# Altium PCB adacus_pcb.PcbDoc
Units mil, origin at the board's own origin, x right, y up, seen from the top; angles counter-clockwise.
Board outline 2700 x 3700 mil, 4 copper layers (Top Layer (SIG), Layer 2 (GND), Layer 3 (GND), Bottom Layer (SIG)), stack 62.449 mil thick; 113 components, 68 nets, 339 pads, 48 vias.
Unrouted connection lines stored in the file: 238.
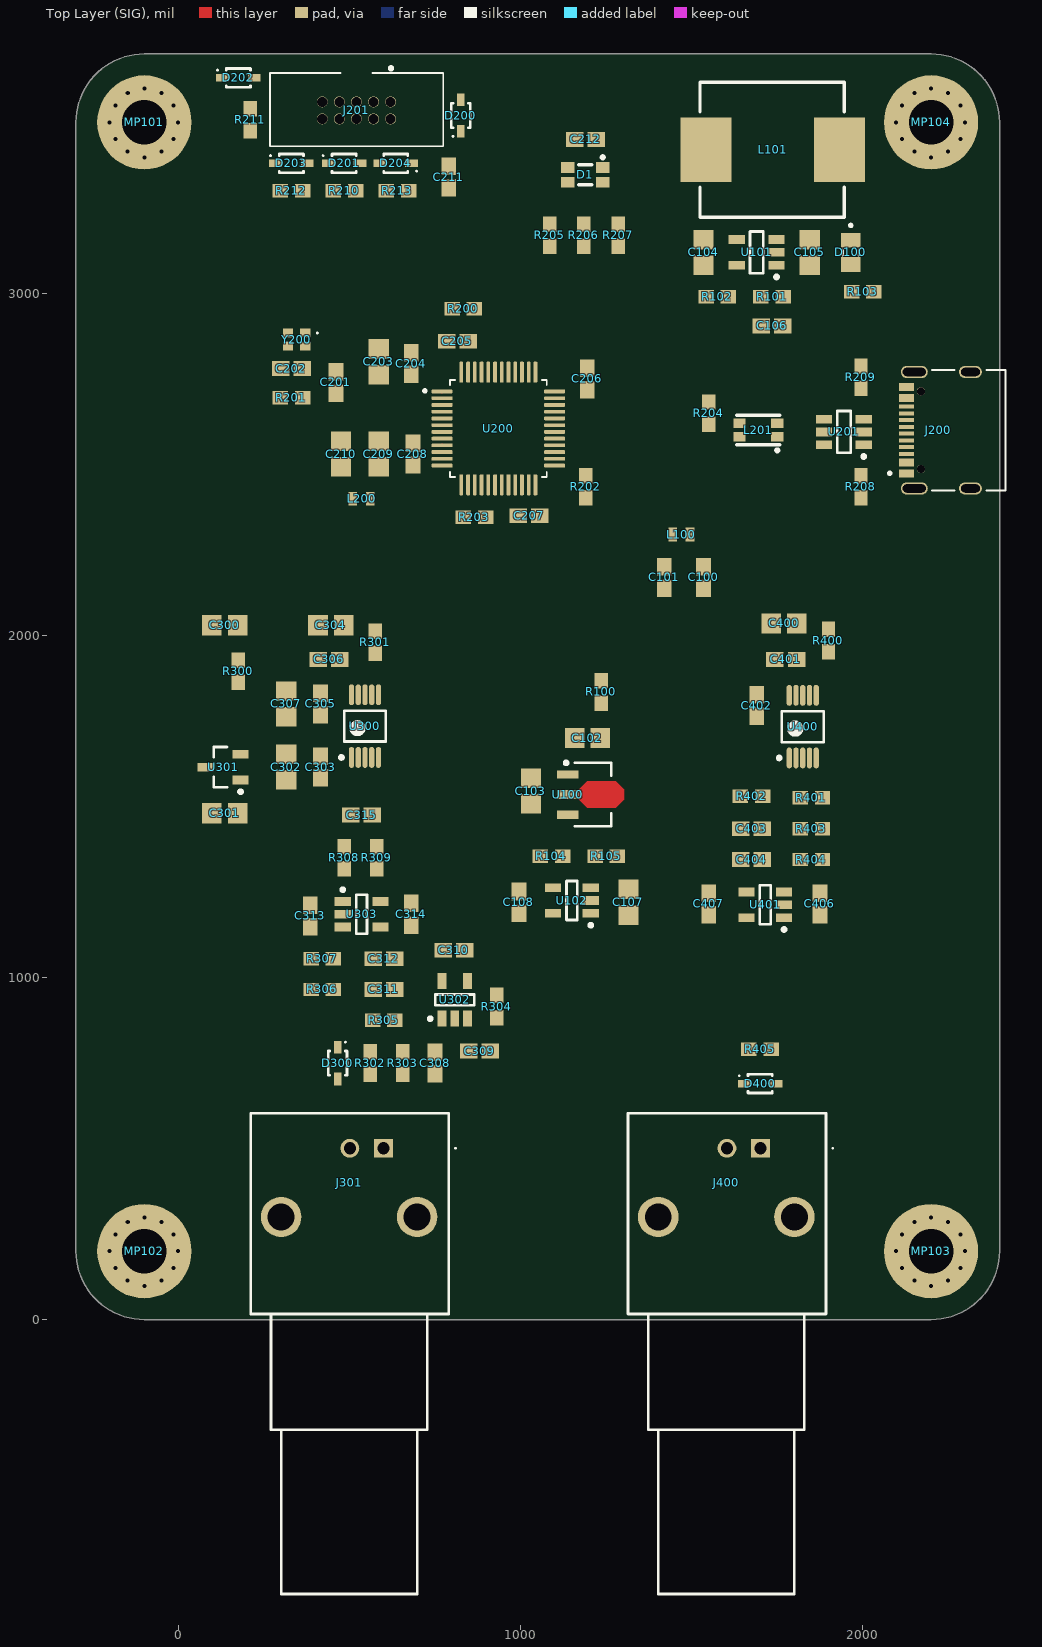
[diagram p0: Top Layer (SIG) view]
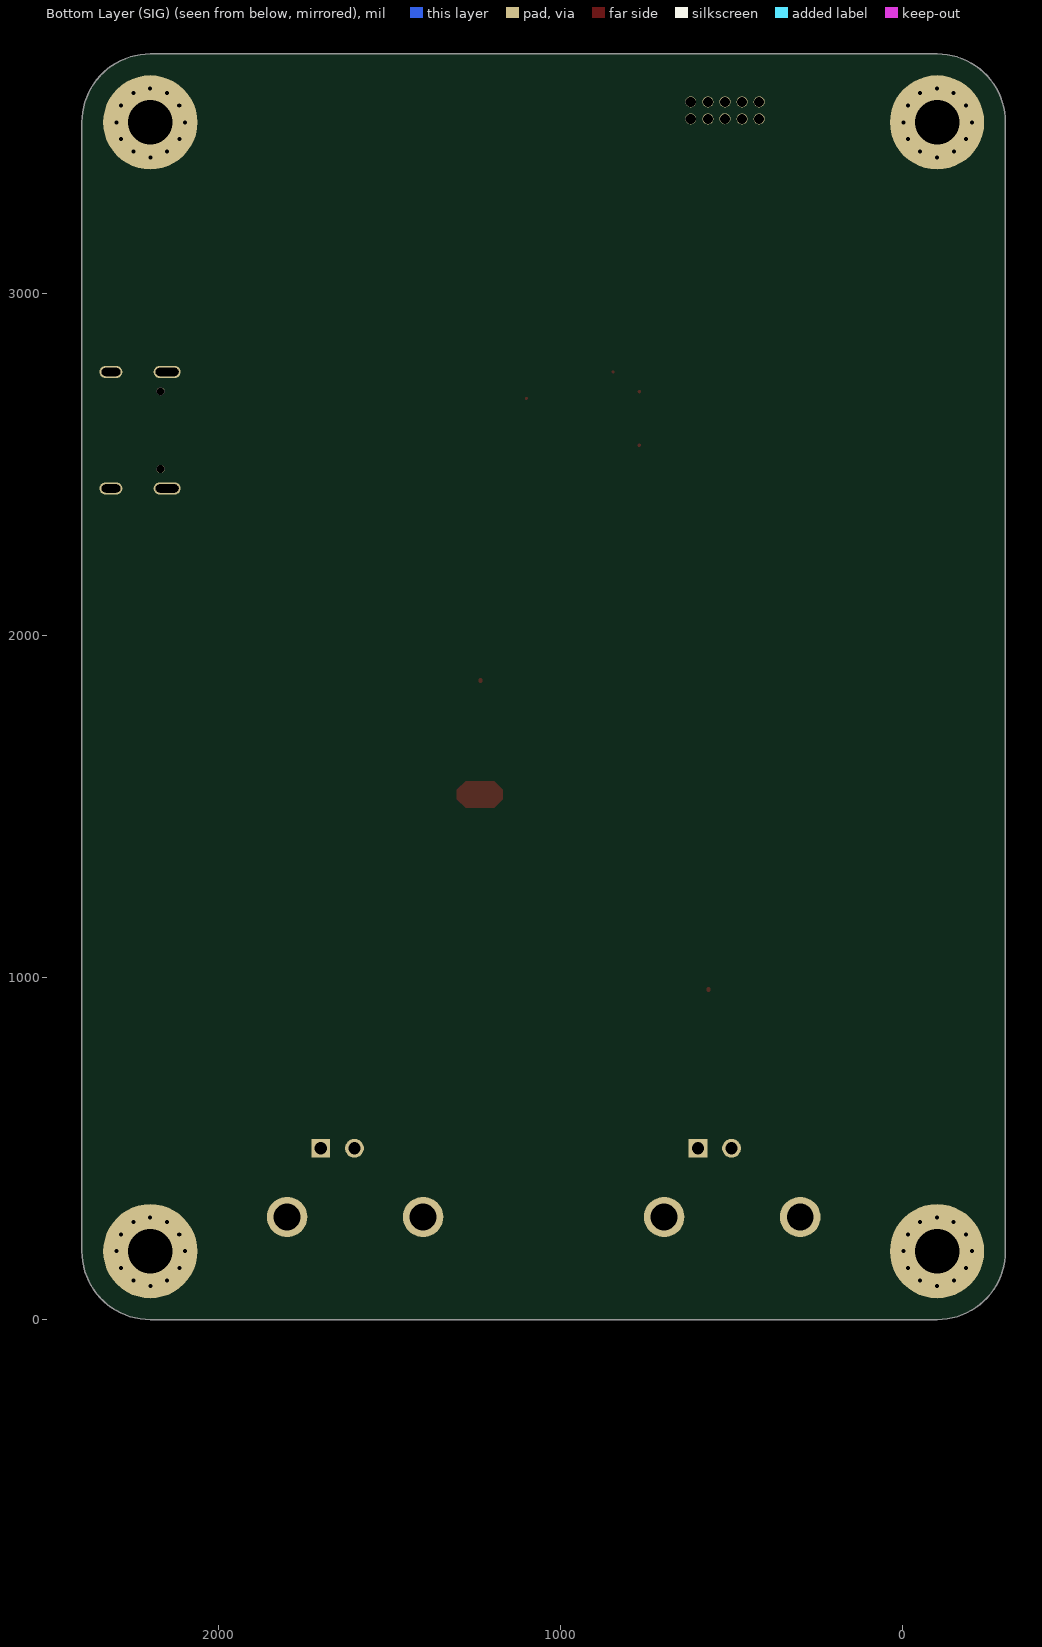
[diagram p1: Bottom Layer (SIG) view, seen from below]

## Layer stack, top to bottom
Top Solder: solder mask 1, SM-001, Dk 3.8
Top Layer (SIG): signal copper 1.378
Dielectric 2: prepreg 8.2835, PP-022, Dk 4.4
Layer 2 (GND): signal copper 0.5984
Dielectric 1: core 41.9291, FR-4, Dk 4.6
Layer 3 (GND): signal copper 0.5984
Dielectric 3: prepreg 8.284, PP-022, Dk 4.4
Bottom Layer (SIG): signal copper 1.378
Bottom Solder: solder mask 1, SM-001, Dk 3.8

## Board outline
-300,200 -300,3500 cw(c-100,3500) -100,3700 2200,3700 cw(c2200,3500) 2400,3500 2400,200 cw(c2200,200) 2200,0 -100,0 cw(c-100,200)

## Design rules (kind name [scope] priority, off if disabled: settings)
BoardOutlineClearance [All] p1: gap=10 ignorepadtopadclearanceinfootprint=FALSE except(0: Arc-SplitContinuation Track-SplitContinuation SMDPad-SplitContinuation THPad-SplitContinuation Via-SplitContinuation Fill-SplitContinuation Poly-SplitContinuation Region-SplitContinuation Text-SplitContinuation)
Clearance Clearance_basic_JLCPCB [All] p1: gap=9.84 ignorepadtopadclearanceinfootprint=TRUE except(5.91: SMDPad-SMDPad; 7.87: Arc-SMDPad Track-SMDPad; 11.81: Arc-Via Track-Via Via-Via; 14.96: Arc-THPad Track-THPad; 21.65: THPad-THPad)
DiffPairsRouting DiffPairsRouting_basic [All] p1: maxlimit=10 minlimit=8 mostfreqgap=8 toplayer_minwidth=5 toplayer_maxwidth=15 toplayer_prefwidth=10.28 midlayer1_minwidth=5 midlayer1_maxwidth=15 midlayer1_prefwidth=10.28 midlayer2_minwidth=5 midlayer2_maxwidth=15 midlayer2_prefwidth=10.28 bottomlayer_minwidth=5 bottomlayer_maxwidth=15 bottomlayer_prefwidth=10.28 maxuncoupledlength=500
DiffPairsRouting [All] p2: maxlimit=10 minlimit=10 mostfreqgap=10 toplayer_minwidth=15 toplayer_maxwidth=15 toplayer_prefwidth=15 midlayer1_minwidth=15 midlayer1_maxwidth=15 midlayer1_prefwidth=15 midlayer2_minwidth=15 midlayer2_maxwidth=15 midlayer2_prefwidth=15 bottomlayer_minwidth=15 bottomlayer_maxwidth=15 bottomlayer_prefwidth=15 maxuncoupledlength=500
HoleSize [All] p1: absolutevalues=TRUE maxlimit=248.03 minlimit=7.87 maxpercent=80.000 minpercent=20.000
HoleToHoleClearance [All] p1: gap=21.65 allowstackedmicrovias=FALSE
MinimumAnnularRing [All] p1: minimumring=5.12
PolygonConnect [All] p1: connectstyle=Relief reliefconductorwidth=10 reliefentries=4 polygonreliefangle="90 Angle" airgapwidth=10
RoutingVias [All] p1: holewidth=28 width=50 viastyle="Through Hole" minholewidth=5.91 minwidth=9.84 maxholewidth=28 maxwidth=50
SolderMaskExpansion [All] p1: expansion=4 istentingtop=FALSE
SupplyNets "Schematic Supply Nets_6" [InNet('+5V')] p1: voltage=0.000
SupplyNets "Schematic Supply Nets_5" [InNet('+3V3')] p2: voltage=0.000
SupplyNets "Schematic Supply Nets_4" [InNet('GND')] p3: voltage=0.000
SupplyNets "Schematic Supply Nets_3" [InNet('VDDA')] p4: voltage=0.000
SupplyNets "Schematic Supply Nets_2" [InNet('+VBUS')] p5: voltage=0.000
SupplyNets "Schematic Supply Nets_1" [InNet('+3V3A')] p6: voltage=0.000
SupplyNets "Schematic Supply Nets" [InNet('VCOM')] p7: voltage=0.000
Width [All] p1: maxlimit=100 minlimit=3.5 preferedwidth=10
27 further rules are at their usual default settings.

## Classes and differential pairs
component class Power_adacus_sch: C100 C101 C102 C103 C104 C105 C106 C107 C108 D100 L100 L101 MP101 MP102 MP103 MP104 R100 R101 R102 R103 R104 R105 U100 U101 U102
component class MCU_adacus_sch: C201 C202 C203 C204 C205 C206 C207 C208 C209 C210 C211 C212 D1 D200 D201 D202 D203 D204 J200 J201 L200 L201 R200 R201 R202 R203 R204 R205 R206 R207 R208 R209 R210 R211 R212 R213 U200 U201 Y200
component class DAC_adacus_sch: C400 C401 C402 C403 C404 C406 C407 D400 J400 R400 R401 R402 R403 R404 R405 U400 U401
component class Analog_adacus_sch: C300 C301 C302 C303 C304 C305 C306 C307 C308 C309 C310 C311 C312 C313 C314 C315 D300 J301 R300 R301 R302 R303 R304 R305 R306 R307 R308 R309 U300 U301 U302 U303
differential pair MCU_USB: +MCU_USB_P -MCU_USB_N
differential pair MCU_ESD_USB: +MCU_ESD_USB_P -MCU_ESD_USB_N
differential pair USB_CONN_D: +USB_CONN_D_P -USB_CONN_D_N

## Components (designator, comment, footprint, x,y, rotation, side; value= is the part's Value field where it differs from the comment)
C100 "Capacitor" "[0603] CAPC1608X10M [A-LD]" 1535,2170 r90 top value=1u/10V
C101 "Capacitor" "[0603] CAPC1608X10M [A-LD]" 1420,2170 r90 top value=1u/10V
C102 "Capacitor" "[0805] CAPC2012X09M [A - LD]" 1195,1700 r0 top value=22u/10V
C103 "Capacitor" "[0805] CAPC2012X09M [A - LD]" 1030,1545 r270 top value=22u/10V
C104 "Capacitor" "[0805] CAPC2012X09M [A - LD]" 1535,3120 r90 top value=22u/10V
C105 "Capacitor" "[0805] CAPC2012X09M [A - LD]" 1845,3120 r90 top value=22u/10V
C106 "Capacitor" "[0603] CAPC1608X10M [A-LD]" 1735,2905 r0 top value=DPN
C107 "Capacitor" "[0805] CAPC2012X09M [A - LD]" 1315,1220 r90 top value=22u/10V
C108 "Capacitor" "[0603] CAPC1608X10M [A-LD]" 995,1220 r90 top value=100n/10V
C201 "Capacitor" "[0603] CAPC1608X10M [A-LD]" 460,2740 r90 top value=10p/10V
C202 "Capacitor" "[0603] CAPC1608X10M [A-LD]" 330,2780 r180 top value=10p/10V
C203 "Capacitor" "[0805] CAPC2012X09M [A - LD]" 585,2800 r270 top value=10u/10V
C204 "Capacitor" "[0603] CAPC1608X10M [A-LD]" 680,2795 r270 top value=100n/10V
C205 "Capacitor" "[0603] CAPC1608X10M [A-LD]" 815,2860 r0 top value=100n/10V
C206 "Capacitor" "[0603] CAPC1608X10M [A-LD]" 1195,2750 r270 top value=100n/10V
C207 "Capacitor" "[0603] CAPC1608X10M [A-LD]" 1025,2350 r0 top value=100n/10V
C208 "Capacitor" "[0603] CAPC1608X10M [A-LD]" 685,2530 r270 top value=10n/10V
C209 "Capacitor" "[0805] CAPC2012X09M [A - LD]" 585,2530 r270 top value=1u/10V
C210 "Capacitor" "[0805] CAPC2012X09M [A - LD]" 475,2530 r270 top value=1u/10V
C211 "Capacitor" "[0603] CAPC1608X10M [A-LD]" 790,3340 r270 top value=100n/10V
C212 "Capacitor" "[0603] CAPC1608X10M [A-LD]" 1190,3450 r0 top value=100n/10V
C300 "Capacitor" "[0805] CAPC2012X09M [A - LD]" 135,2030 r0 top value=10u/10V
C301 "Capacitor" "[0805] CAPC2012X09M [A - LD]" 135,1480 r0 top value=10u/10V
C302 "Capacitor" "[0805] CAPC2012X09M [A - LD]" 315,1615 r90 top value=10u/10V
C303 "Capacitor" "[0603] CAPC1608X10M [A-LD]" 415,1615 r90 top value=100n/10V
C304 "Capacitor" "[0805] CAPC2012X09M [A - LD]" 445,2030 r0 top value=10u/10V
C305 "Capacitor" "[0603] CAPC1608X10M [A-LD]" 415,1800 r90 top value=100n/10V
C306 "Capacitor" "[0603] CAPC1608X10M [A-LD]" 440,1930 r0 top value=100n/10V
C307 "Capacitor" "[0805] CAPC2012X09M [A - LD]" 315,1800 r90 top value=10u/10V
C308 "Capacitor" "[0603] CAPC1608X10M [A-LD]" 750,750 r90 top value=150p/10V
C309 "Capacitor" "[0603] CAPC1608X10M [A-LD]" 880,785 r180 top value=100n/10V
C310 "Capacitor" "[0603] CAPC1608X10M [A-LD]" 805,1080 r0 top value=100n/10V
C311 "Capacitor" "[0603] CAPC1608X10M [A-LD]" 600,965 r180 top value=150p/10V
C312 "Capacitor" "[0603] CAPC1608X10M [A-LD]" 600,1055 r180 top value=150p/10V
C313 "Capacitor" "[0603] CAPC1608X10M [A-LD]" 385,1180 r270 top value=1n/10V
C314 "Capacitor" "[0603] CAPC1608X10M [A-LD]" 680,1185 r270 top value=100n/10V
C315 "Capacitor" "[0603] CAPC1608X10M [A-LD]" 535,1475 r180 top value=150p/10V
C400 "Capacitor" "[0805] CAPC2012X09M [A - LD]" 1770,2035 r0 top value=10u/10V
C401 "Capacitor" "[0603] CAPC1608X10M [A-LD]" 1775,1930 r0 top value=100n/10V
C402 "Capacitor" "[0603] CAPC1608X10M [A-LD]" 1690,1795 r90 top value=1u/10V
C403 "Capacitor" "[0603] CAPC1608X10M [A-LD]" 1675,1435 r0 top value=150p/10V
C404 "Capacitor" "[0603] CAPC1608X10M [A-LD]" 1675,1345 r0 top value=150p/10V
C406 "Capacitor" "[0603] CAPC1608X10M [A-LD]" 1875,1215 r90 top value=1n/10V
C407 "Capacitor" "[0603] CAPC1608X10M [A-LD]" 1550,1215 r90 top value=100n/10V
D1 "E6C1206RGBC3UDA" E6C1206RGBC3UDA 1137.64,3368.31 r0 top
D100 "LED GREEN" LEDC2012X120N 1965,3120 r270 top
D200 "PESD3V3L1BA,115" SODFL250X110-2M 825,3520 r90 top
D201 "PESD3V3L1BA,115" SODFL250X110-2M 483.74,3380 r0 top
D202 "PESD3V3L1BA,115" SODFL250X110-2M 175,3630 r0 top
D203 "PESD3V3L1BA,115" SODFL250X110-2M 330,3380 r0 top
D204 "PESD3V3L1BA,115" SODFL250X110-2M 635,3380 r180 top
D300 "PESD3V3L1BA,115" SODFL250X110-2M 465,750 r270 top
D400 "PESD3V3L1BA,115" SODFL250X110-2M 1700,690 r0 top
J200 "USB TYPE-C" HRO_TYPE-C-31-M-12 2315,2600 r90 top
J201 "2x5x1.27mm" 2X10_BOXHEADER 520,3535 r180 top
J301 "DOSIN-801-0031" DOSIN8010031 599.21,500.79 r180 top
J400 "DOSIN-801-0031" DOSIN8010031 1701.57,500.79 r180 top
L100 "Inductor" PM0603-10NJ 1495,2295 r180 top value=10n/0.15R
L101 "Inductor" "[L] SPM10054T-680M-HZR" 1735,3420 r180 top value=68u
L200 "Inductor" PM0603-10NJ 509.61,2400 r0 top value=10n
L201 "CMF3216F-900-2P-T" CMF3216F-900-2P-T 1750.25,2620 r180 top
MP101 "Mounting hole" Mounting_hole_M3 -100,3500 r0 top
MP102 "Mounting hole" Mounting_hole_M3 -100,200 r0 top
MP103 "Mounting hole" Mounting_hole_M3 2200,200 r0 top
MP104 "Mounting hole" Mounting_hole_M3 2200,3500 r0 top
R100 "Resistor" "[0603] RESC1608X06M [A-LD]" 1235,1835 r270 top value=10R/5%
R101 "Resistor" "[0603] RESC1608X06M [A-LD]" 1735,2990 r0 top value=100K/5%
R102 "Resistor" "[0603] RESC1608X06M [A-LD]" 1575,2990 r0 top value=22K/5%
R103 "Resistor" "[0603] RESC1608X06M [A-LD]" 2000,3005 r180 top value=1K/5%
R104 "Resistor" "[0603] RESC1608X06M [A-LD]" 1090,1355 r180 top value=1K/5%
R105 "Resistor" "[0603] RESC1608X06M [A-LD]" 1250,1355 r180 top value=1K/5%
R200 "Resistor" "[0603] RESC1608X06M [A-LD]" 832.48,2955 r0 top value=10K/5%
R201 "Resistor" "[0603] RESC1608X06M [A-LD]" 330,2695 r0 top value=0R
R202 "Resistor" "[0603] RESC1608X06M [A-LD]" 1190,2435 r270 top value=10K/5%
R203 "Resistor" "[0603] RESC1608X06M [A-LD]" 865,2345 r0 top value=1k5/5%
R204 "Resistor" "[0603] RESC1608X06M [A-LD]" 1550,2650 r90 top value=1K5/5%
R205 "Resistor" "[0603] RESC1608X06M [A-LD]" 1085,3170 r270 top value=1K/5%
R206 "Resistor" "[0603] RESC1608X06M [A-LD]" 1185,3170 r270 top value=1K/5%
R207 "Resistor" "[0603] RESC1608X06M [A-LD]" 1285,3170 r270 top value=1K/5%
R208 "Resistor" "[0603] RESC1608X06M [A-LD]" 1995,2435 r270 top value=5K1/5%
R209 "Resistor" "[0603] RESC1608X06M [A-LD]" 1995,2755 r90 top value=5K1/5%
R210 "Resistor" "[0603] RESC1608X06M [A-LD]" 485,3300 r180 top value=49R9/5%
R211 "Resistor" "[0603] RESC1608X06M [A-LD]" 210,3507.52 r270 top value=49R9/5%
R212 "Resistor" "[0603] RESC1608X06M [A-LD]" 330,3300 r180 top value=49R9/5%
R213 "Resistor" "[0603] RESC1608X06M [A-LD]" 640,3300 r0 top value=49R9/5%
R300 "Resistor" "[0603] RESC1608X06M [A-LD]" 175,1895 r90 top value=49R9/5%
R301 "Resistor" "[0603] RESC1608X06M [A-LD]" 575,1980 r90 top value=0R
R302 "Resistor" "[0603] RESC1608X06M [A-LD]" 560,750 r90 top value=1k/5%
R303 "Resistor" "[0603] RESC1608X06M [A-LD]" 655,750 r90 top value=2M2/5%
R304 "Resistor" "[0603] RESC1608X06M [A-LD]" 930,915 r90 top value=2M2/5%
R305 "Resistor" "[0603] RESC1608X06M [A-LD]" 600,875 r0 top value=6K8/5%
R306 "Resistor" "[0603] RESC1608X06M [A-LD]" 420,965 r0 top value=6K8/5%
R307 "Resistor" "[0603] RESC1608X06M [A-LD]" 420,1055 r180 top value=6K8/5%
R308 "Resistor" "[0603] RESC1608X06M [A-LD]" 485,1350 r270 top value=1K/5%
R309 "Resistor" "[0603] RESC1608X06M [A-LD]" 580,1350 r270 top value=1K/5%
R400 "Resistor" "[0603] RESC1608X06M [A-LD]" 1900,1985 r90 top value=0R
R401 "Resistor" "[0603] RESC1608X06M [A-LD]" 1850,1525 r0 top value=10K/5%
R402 "Resistor" "[0603] RESC1608X06M [A-LD]" 1675,1530 r180 top value=6K8/5%
R403 "Resistor" "[0603] RESC1608X06M [A-LD]" 1850,1435 r180 top value=6K8/5%
R404 "Resistor" "[0603] RESC1608X06M [A-LD]" 1850,1345 r0 top value=6K8/5%
R405 "Resistor" "[0603] RESC1608X06M [A-LD]" 1700,790 r180 top value=6K8/5%
U100 "HT7533-1" SOT89-150P354X160-3M 1210,1535 r0 top
U101 "TLV62569" SOT95P280X145-5M 1690,3120 r180 top
U102 "MCP6001UT-I/OT" SOT95P270X145-5M 1150,1225 r180 top
U200 "STM32F103CBT6" TSQFP50P900X900X160-48M 935,2605 r0 top
U201 "USBLC6-2SC6" SOT95P280X145-6M 1945,2595 r180 top
U300 "ADC141S626" TSSOP50P490X110-10M 545,1735 r90 top
U301 "REF3033AIDBZT" SOT95P237X112-3M 130,1615 r180 top
U302 "MCP6001UT-E/OT" SOT95P270X145-5M 807.4,934.88 r90 top
U303 "MCP6001UT-E/OT" SOT95P270X145-5M 535,1185 r0 top
U400 "DAC7563SDGSR" TSSOP50P490X110-10M 1824.69,1733.46 r90 top
U401 "MCP6001UT-E/OT" SOT95P270X145-5M 1715.12,1212.4 r180 top
Y200 "ECS-2016MV-160-DN" ECS-2016MV-160-DN 345,2865 r180 top

## Footprints (in the part's own frame and the unit in brackets; to place one, negate y for a bottom-side part, rotate by r counter-clockwise, add the part's x,y. Pads: shape width x height; smd on the part's side, far side on the other; paste and mask are expansions set on the pad)
2X10_BOXHEADER [mil]
  round 32 hole 29.53: 1(-100,-25) 2(-100,25) 3(-50,-25) 4(-50,25) 5(0,-25) 6(0,24.61) 7(50,-25) 8(50,25) 9(100,-25) 10(100,25)
  silkscreen extent -254,-127 252,105, body extent -249,-104 249,100, height 213
"[0603] CAPC1608X10M [A-LD]" [mm] "Chip Capacitor, 2-Leads, Body 1.60x0.80mm, IPC Low Density"
  rect 1.3x1.1 smd: 1(-0.8,0) 2(0.8,0)
  body extent -0.9,-0.5 0.9,0.5, height 1
"[0603] RESC1608X06M [A-LD]" [mm] "Chip Resistor, 2-Leads, Body 1.60x0.80mm, IPC Low Density"
  rect 1.15x1 smd: 1(-0.825,0) 2(0.825,0)
  body extent -0.85,-0.45 0.85,0.45, height 0.55
"[0805] CAPC2012X09M [A - LD]" [mm] "Chip Capacitor, 2-Leads, Body 2.00x1.25mm, IPC Low Density"
  rect 1.45x1.5 smd: 1(-0.95,0) 2(0.95,0)
  body extent -1.07,-0.67 1.07,0.67, height 0.9
"[L] SPM10054T-680M-HZR" [mm] "Power Inductors - SMD 68uH 20% 3.7A 163Mohm"
  rect 3.8x4.8 smd: 1(-5,0) 2(4.9,0)
  silkscreen extent -5.35,-5 5.35,5, body extent -5.35,-5 5.35,5, height 5.26
CMF3216F-900-2P-T [mm] "90O@100MHz 0.3O 2 1206 Common Mode Filters ROHS"
  rect 0.9x0.7 smd paste+0 mask+0.051: 1(0,1) 2(0,0) 3(2.8,0) 4(2.8,1)
  silkscreen extent -0.2,-0.6 3,2.1
DOSIN8010031 [mm]
  rect 1.4x1.4 hole 0.9: 1(0,0)
  round 1.4 hole 0.9: 2(2.5,0)
  round 3 hole 2: MH1(-2.5,5.1) MH2(7.6,5.1)
  silkscreen extent -5.4,-2.6 9.85,33.1
E6C1206RGBC3UDA [mm] "RGB 1206 Light Emitting Diodes (LED) ROHS"
  rect 1x0.8 smd paste+0 mask+0.051: 1(0,0) 2(2.6,0) 3(0,-1.1) 4(2.6,-1.1)
  silkscreen extent 0.8,-1.3 2.7,0.85, body extent -0.18,-1.33 2.82,0.17, height 1.2
ECS-2016MV-160-DN [mm] "Standard Clock Oscillators 16.000 MHz Standby CMOS Multi-Volt 1.6 - 3.6 V +/-20ppm -40 - 85C 4-SMD 2.0 x 1.6mm"
  rect 0.775x0.675 smd: 1(-0.638,-0.488) 2(0.638,-0.488) 3(0.638,0.487) 4(-0.638,0.487)
  silkscreen extent -1.6,-0.54 -1.5,-0.44, body extent -1,-0.8 1,0.8, height 0.95
HRO_TYPE-C-31-M-12 [mm]
  rect 0.6x1.14 smd mask+0.05: A1(-3.2,4.75) A4(-2.4,4.75) B1(3.2,4.75) B4(2.4,4.75)
  rect 0.3x1.14 smd mask+0.05: A5(-1.25,4.75) A6(-0.25,4.75) A7(0.25,4.75) A8(1.25,4.75) B5(1.75,4.75) B6(0.75,4.75) B7(-0.75,4.75) B8(-1.75,4.75)
  oval 0.9x2 hole 0.6 slot 1.7 at 90 deg: S1(-4.325,4.17) S2(4.325,4.17)
  oval 0.9x1.7 hole 0.6 slot 1.4 at 90 deg: S3(-4.325,0) S4(4.325,0)
  round 0.6 hole 0.6 unplated: ""(-2.89,3.68) ""(2.89,3.68)
  silkscreen extent -4.47,-2.6 4.47,6.1, body extent -4.47,-2.6 4.47,5.31, height 3.31
LEDC2012X120N [mm]
  rect 1.1x1.45 smd: 1(-0.9,0) 2(0.9,0)
  silkscreen extent -2.1,-0.6 0.2,0.6, body extent -1,-0.65 1,0.65, height 0.9
Mounting_hole_M3 [mm] "Mounting hole for M3 screw"
  round 7 / inner round 5 / far side round 7 hole 3.3 unplated: 1(0,-0.001)
PM0603-10NJ [mm] "FIXED IND 10NH 700MA 150MOHM SMD"
  rect 0.64x1.02 smd: 1(0,0) 2(1.28,0)
  body extent -0.27,-0.56 1.54,0.56, height 1.07
SODFL250X110-2M [mm] "SODFL, 2-Leads, Body 1.25x2.50mm, IPC Low Density"
  rect 0.95x0.55 smd: 1(-1.175,0) 2(1.175,0)
  silkscreen extent -1.6,-0.7 0.9,0.7, body extent -1.25,-0.67 1.25,0.67, height 1.1
SOT89-150P354X160-3M [mm] "SOT89, 3-Leads, Body 4.55x2.50mm, Pitch 1.50mm, Lead Span 3.5mm, IPC Low Density"
  rect 1.6x0.6 smd: 1(-1.827,1.5) 3(-1.827,-1.5)
  rect 1.6x0.7 smd: 2(-1.827,0)
  Top Layer (SIG) region: -1.027,0.35 -0.377,1 1.723,1 2.373,0.35 2.373,-0.35 1.723,-1 -0.377,-1 -1.027,-0.35
  silkscreen extent -2.08,-2.35 1.4,2.47, body extent -1.3,-2.35 1.4,2.35, height 1.6
SOT95P237X112-3M [mm] "SOT23, 3-Leads, Body 2.92x2.37mm, Pitch 0.95mm, IPC Low Density"
  rect 1.2x0.65 smd: 1(-1.3,0.95) 2(-1.3,-0.95) 3(1.3,0)
  silkscreen extent -1.43,-1.5 0.7,1.95, body extent -1.32,-1.52 1.32,1.52, height 1.12
SOT95P270X145-5M [mm] "SOT23, 5-Leads, Body 2.80x2.70mm, Pitch 0.95mm, IPC Low Density"
  rect 1.2x0.65 smd: 1(-1.4,0.95) 2(-1.4,0) 3(-1.4,-0.95) 4(1.4,-0.95) 5(1.4,0.95)
  silkscreen extent -1.53,-1.45 0.4,1.95, body extent -1.4,-1.45 1.4,1.45, height 1.45
SOT95P280X145-5M [mm] "SOT23, 5-Leads, Body 2.90x2.80mm, Pitch 0.95mm, IPC Low Density"
  rect 1.2x0.65 smd: 1(-1.475,0.95) 2(-1.475,0) 3(-1.475,-0.95) 4(1.475,-0.95) 5(1.475,0.95)
  silkscreen extent -1.6,-1.55 0.5,1.95, body extent -1.5,-1.53 1.5,1.53, height 1.45
SOT95P280X145-6M [mm] "SOT23, 6-Leads, Body 2.93x2.80mm, Pitch 0.95mm, IPC Low Density"
  rect 1.2x0.65 smd: 1(-1.475,0.95) 2(-1.475,0) 3(-1.475,-0.95) 4(1.475,-0.95) 5(1.475,0) 6(1.475,0.95)
  silkscreen extent -1.6,-1.55 0.5,1.95, body extent -1.5,-1.53 1.5,1.53, height 1.45
TSQFP50P900X900X160-48M [mm]
  rrect50% 1.56x0.28 smd: 1(-4.18,2.75) 2(-4.18,2.25) 3(-4.18,1.75) 4(-4.18,1.25) 5(-4.18,0.75) 6(-4.18,0.25) 7(-4.18,-0.25) 8(-4.18,-0.75) 9(-4.18,-1.25) 10(-4.18,-1.75) 11(-4.18,-2.25) 12(-4.18,-2.75) 25(4.18,-2.75) 26(4.18,-2.25) 27(4.18,-1.75) 28(4.18,-1.25) 29(4.18,-0.75) 30(4.18,-0.25) 31(4.18,0.25) 32(4.18,0.75) 33(4.18,1.25) 34(4.18,1.75) 35(4.18,2.25) 36(4.18,2.75)
  rrect50% 0.28x1.56 smd: 13(-2.75,-4.18) 14(-2.25,-4.18) 15(-1.75,-4.18) 16(-1.25,-4.18) 17(-0.75,-4.18) 18(-0.25,-4.18) 19(0.25,-4.18) 20(0.75,-4.18) 21(1.25,-4.18) 22(1.75,-4.18) 23(2.25,-4.18) 24(2.75,-4.18) 37(2.75,4.18) 38(2.25,4.18) 39(1.75,4.18) 40(1.25,4.18) 41(0.75,4.18) 42(0.25,4.18) 43(-0.25,4.18) 44(-0.75,4.18) 45(-1.25,4.18) 46(-1.75,4.18) 47(-2.25,4.18) 48(-2.75,4.18)
  silkscreen extent -5.56,-3.6 3.6,3.6, body extent -4.5,-4.5 4.5,4.5, height 1.6
TSSOP50P490X110-10M [mm] "TSSOP, 10-Leads, Body 3.00x3.00mm, Pitch 0.50mm, IPC Low Density"
  oval 1.55x0.4 smd: 1(-2.325,1) 2(-2.325,0.5) 3(-2.325,0) 4(-2.325,-0.5) 5(-2.325,-1) 6(2.325,-1) 7(2.325,-0.5) 8(2.325,0) 9(2.325,0.5) 10(2.325,1)
  silkscreen extent -2.45,-1.55 1.15,1.87, body extent -2.45,-1.55 2.45,1.55, height 1.1

## Part data
C100 C101 C106 C108 C201 C202 C204 C205 C206 C207 C208 C209 C210 C211 C212 C303 C305 C306 C308 C309 C310 C311 C312 C313 C314 C315 C401 C402 C403 C404 C406 C407: "Standard Capacitor", Package=0603
C102 C103 C104 C105 C107 C203 C300 C301 C302 C304 C307 C400: "Standard Capacitor", Package=0805
D1: library part LED_RGB, "RGB 1206 Light Emitting Diodes (LED) ROHS", Datasheet=https://datasheet.lcsc.com/lcsc/2203301730_EKINGLUX-E6C1206RGBC3UDA_C375571.pdf, Supplier Link=https://www.lcsc.com/product-detail/Light-Emitting-Diodes-LED_EKINGLUX-E6C1206RGBC3UDA_C375571.html
D100: "Standard LED. Green color"
D200 D201 D202 D203 D204 D300 D400: "ESD Suppressors / TVS Diodes PESD3V3L1BA/SOD323/SOD2", Datasheet=https://www.mouser.pl/datasheet/2/916/PESD3V3L1BA-3162553.pdf, Supplier Link=https://www.mouser.pl/ProductDetail/Nexperia/PESD3V3L1BA115?qs=LOCUfHb8d9tfcQwAsqvzKg%3D%3D
J201: library part "SWD Connector", "SWD Connector 2x5x1.27mm pin count"
J301 J400: library part "BNC Connector", "BNC Board Edge Bend 9.6mm Plugin RF Connectors / Coaxial Connectors"
L100 L101 L200: "Standard Inductor"
  L100: Datasheet=https://product.tdk.com/system/files/dam/doc/product/inductor/inductor/smd/catalog/inductor_automotive_power_spm10054-hzr_en.pdf, Supply Link=https://www.mouser.pl/ProductDetail/TDK/SPM10054T-680M-HZR?qs=amGC7iS6iy%252BIJTKFZp9jOQ%3D%3D
L201: "90Ω@100MHz 0.3Ω 2 1206 Common Mode Filters ROHS", Datasheet=https://datasheet.lcsc.com/lcsc/2304140030_HYHONGYEX-CMF3216F-900-2P-T_C963740.pdf, Supplier Link=https://www.lcsc.com/product-detail/Common-Mode-Filters_HYHONGYEX-CMF3216F-900-2P-T_C963740.html
R100 R101 R102 R103 R104 R105 R200 R201 R202 R203 R204 R205 R206 R207 R208 R209 R210 R211 R212 R213 R300 R301 R302 R303 R304 R305 R306 R307 R308 R309 R400 R401 R402 R403 R404 R405: "Standard Resistor", Package=0603
U100: "100mA TinyPower LDO", Datasheet=https://datasheet.lcsc.com/lcsc/1811062113_Holtek-Semicon-HT7533-1_C14289.pdf
U101: "2-A High Efficiency Synchronous Buck Converter in SOT Package", Datasheet=https://www.ti.com/lit/ds/symlink/tlv62569.pdf?ts=1697901280609&ref_url=https%253A%252F%252Fwww.google.com%252F
U102 U302 U303 U401: "Operational Amplifiers - Op Amps Single 1.8V 1MHz", Datasheet=https://eu.mouser.com/datasheet/2/268/MCHP_S_A0009381759_1-2520804.pdf, Supplier=https://eu.mouser.com/ProductDetail/Microchip-Technology/MCP6001UT-I-OT?qs=Sez7gRs8XSU2iw24kVuIOw%3D%3D
U200: "ARM Microcontrollers - MCU 32BIT Cortex M3 128K MED Performance LN", Datasheet=https://www.mouser.pl/datasheet/2/389/stm32f103c8-1851025.pdf, Supplier Link=https://www.mouser.pl/ProductDetail/STMicroelectronics/STM32F103CBT6?qs=WxFF5lh7QM3goh6GV5Ogig%3D%3D&_gl=1*1oo9tks*_ga*dW5kZWZpbmVk*_ga_15W4STQT4T*dW5kZWZpbmVk*_ga_1KQLCYKRX3*dW5kZWZpbmVk
U201: library part USBLC6-2, "Very low capacitance ESD protection", Datasheet=https://www.mouser.pl/datasheet/2/389/usblc6_2-1852789.pdf, Supplier Link=https://www.mouser.pl/ProductDetail/STMicroelectronics/USBLC6-2SC6?qs=po45yt2pPpu%2FhNIlwQdTlg%3D%3D
U300: "Analog to Digital Converters - ADC 14-Bit, 50kSPS to 250kSPS, Differential Input, Micro Power ADC 10-VSSOP -40 to 85", Datasheet=https://www.ti.com/lit/ds/symlink/adc141s626.pdf?HQS=dis-mous-null-mousermode-dsf-pf-null-wwe&ts=1699301010266&ref_url=https%253A%252F%252Fwww.mouser.pl%252F, Supplier Link=https://www.mouser.pl/ProductDetail/Texas-Instruments/ADC141S626CIMM-NOPB?qs=7X5t%252BdzoRHCk2zqpP70%252BpA%3D%3D&_gl=1*rx7evx*_ga*dW5kZWZpbmVk*_ga_15W4STQT4T*dW5kZWZpbmVk*_ga_1KQLCYKRX3*dW5kZWZpbmVk
U301: "Voltage References 3.3V 50ppm/DegC 50uA SOT23-3 Series", Datasheet=https://www.ti.com/lit/ds/symlink/ref3030.pdf?HQS=dis-mous-null-mousermode-dsf-pf-null-wwe&ts=1699288831021&ref_url=https%253A%252F%252Feu.mouser.com%252F, Supplier Link=https://www.mouser.pl/ProductDetail/Texas-Instruments/REF3033AIDBZT?qs=sSOk4GDDv7wh24Ty1I7PAw%3D%3D
U400: "Digital to Analog Converters - DAC 12B,Dual,Lo Pwr Ultra-Lo Glitch DAC", Datasheet=https://www.ti.com/lit/ds/symlink/dac8162.pdf?ts=1704273536554, Supplier Link=https://eu.mouser.com/ProductDetail/Texas-Instruments/DAC7563SDGSR?qs=QtI0yD1FyOPUuM44rgyQjg%3D%3D
Y200: "Standard Clock Oscillators 16.000 MHz Standby CMOS Multi-Volt 1.6 - 3.6 V +/-20ppm -40 - 85C 4-SMD 2.0 x 1.6mm"

## Via types
v1: diameter 39.37, hole 11.81, Top Layer (SIG) to Bottom Layer (SIG), 48 vias

## Nets (pads, with @x,y where several pads share a name; then routed paths per layer and width w, separated by ;. In a path a pad name is that pad's centre, name@x,y a point inside that pad or via, vN(x,y) a via of type N, cw(c..) or ccw(c..) an arc to the next point about the centre after c; other vN are vias at no path point)
+3V3: C105.2 C106.2 C203.2 C204.2 C205.2 C206.2 C207.2 C212.2 C306.2 C307.2 C400.2 C401.2 D1.2 D100.1 D200.2 J201.1 L101.1 R101.2 R202.2 R203.2 R204.2 U200.1 U200.24 U200.36 U200.48 U201.5 U300.9 U400.9 | length 0.7
  Top Layer (SIG) w10: U200.1@769.92,2712.76 U200.1
+3V3A: C103.2 C108.1 C210.2 C304.2 C305.2 C310.1 C314.1 C407.1 L200.1 R104.2 U100.3 U102.5 U300.10 U302.5 U303.5 U401.5
+5V: C101.2 C104.2 C300.2 L100.1 R100.1 R300.2 U101.1 U101.4 | length 3
  Top Layer (SIG) w11.81: R100.1 R100.1@1235,1870.43
+VBUS: C100.2 J200.A4 J200.B4 L100.2
ADC_IN+: C315.2 R308.1 U300.2
ADC_IN-: C315.1 R309.1 U300.3
ADC_VREF: C302.2 C303.2 U300.1 U301.2
Boot_0: R200.2 U200.44
DAC_NCLR: U200.21 U400.5
DAC_NLDAC: U200.22 U400.4
DAC_OUT_A: R402.2 U400.1
DAC_OUT_B: R401.1 U400.2
GND: C100.1 C101.1 C102.1 C103.1 C104.1 C105.1 C107.1 C108.2 C201.1 C202.1 C203.1 C204.1 C205.1 C206.1 C207.1 C208.1 C209.1 C210.1 C211.1 C212.1 C300.1 C301.1 C302.1 C303.1 C304.1 C305.1 C306.1 C307.1 C308.1 C310.2 C311.1 C312.1 C314.2 C400.1 C401.1 C402.1 C403.1 C404.1 C407.2 D200.1 D201.1 D202.1 D203.1 D204.1 D300.1 D400.1 J200.A1 J200.B1 J201.2 J201.3 J201.5 J301.2 J400.2 MP101.1 MP102.1 MP103.1 MP104.1 R102.1 R103.1 R105.1 R200.1 R208.2 R209.2 R303.1 R401.2 U100.1 U101.2 U102.2 U200.8 U200.23 U200.35 U200.47 U201.2 U300.4 U300.5 U301.3 U302.2 U303.2 U400.3 U401.2 Y200.2 Y200.4 | length 4.5
  Top Layer (SIG) w7.87: U200.47 U200.47@847.99,2771.14 ; U200.35 U200.35@1101.14,2692.01
  other v1: -100,97.64 2200,97.64 -148.89,114.69 -50.46,114.73 2151.11,114.69 2249.54,114.73 -184.91,150.72 -14.44,150.75 2115.09,150.72 2285.56,150.75 -202.04,199.97 -1.25,199.97 2097.96,199.97 2298.75,199.97 -184.59,249.18 -14.76,249.21 2115.41,249.18 2285.24,249.21 -148.56,285.2 -50.46,285.2 2151.44,285.2 2249.54,285.2 -99.67,298.39 2200.33,298.39 -100,3397.64 2200,3397.64 -148.89,3414.69 -50.46,3414.73 2151.11,3414.69 2249.54,3414.73 -184.91,3450.72 -14.44,3450.75 2115.09,3450.72 2285.56,3450.75 -202.04,3499.97 -1.25,3499.97 2097.96,3499.97 2298.75,3499.97 -184.59,3549.18 -14.76,3549.21 2115.41,3549.18 2285.24,3549.21 -148.56,3585.2 -50.46,3585.2 2151.44,3585.2 2249.54,3585.2 -99.67,3598.39 2200.33,3598.39
IN: D300.2 J301.1 R302.1
IN_AA_BUF_IN: C312.2 R307.1 U303.3
IN_AA_BUF_OUT: C313.1 R308.2 U303.1 U303.4
IN_BUF: C309.1 R304.1 U302.3
IN_BUF_OUT: R305.2 U302.1 U302.4
LED_RES_GRN: D100.2 R103.2
MCU_ESD_USB_N: L201.1 U201.6
MCU_ESD_USB_P: L201.2 U201.4
MCU_SPI1_MISO: U200.16 U300.7
MCU_SPI1_NSS: R203.1 U200.14 U300.6
MCU_SPI1_SCK: R301.2 U200.15
MCU_SPI2_MISO: U200.28 U400.8
MCU_SPI2_NSS: R202.1 U200.25 U400.6
MCU_SPI2_SCK: R400.2 U200.26
MCU_SWCLK: R211.2 U200.37
MCU_SWDIO: R212.2 U200.34
MCU_TIM_CH1: R205.2 U200.42
MCU_TIM_CH2: R206.2 U200.43
MCU_TIM_CH3: R207.2 U200.45
MCU_TRACE_SWO: R210.2 U200.39
MCU_USB_N: L201.4 U200.32
MCU_USB_P: L201.3 R204.1 U200.33
NetC301_2: C301.2 R300.1 U301.1
NetC311_2: C311.2 R305.1 R306.2 | length 2.8
  Top Layer (SIG) w11.81: C311.2@567.52,964.02 C311.2 C311.2@567.52,965.98
NetC313_2: C313.2 R306.1 R307.2
NetC403_2: C403.2 R402.1 R403.2
NetC406_2: C406.2 R403.1 R404.2
NetR301_1: R301.1 U300.8
NRST: C211.2 R213.2 U200.7
OSC_IN: C201.2 U200.5 Y200.1
OSC_OUT: R201.2 U200.6
OUT: D400.2 J400.1 R405.1
OUT_AA_BUF_IN: C404.2 R404.1 U401.3
OUT_AA_BUF_OUT: C406.1 R405.2 U401.1 U401.4
RC_filt_+5V: C102.2 R100.2 U100.2
RES_SCLK: R400.1 U400.7
RF_IN: C308.2 C309.2 R302.2 R303.2
RGB_P_1: D1.1 R205.1
RGB_P_3: D1.3 R206.1
RGB_P_4: D1.4 R207.1
SW_FEED: C106.1 R101.1 R102.2 U101.5
SW_L_BUCK: L101.2 U101.3
SWD_RES_P_6: D204.2 J201.6 R213.1
SWD_RES_P_8: D201.2 J201.8 R210.1
SWD_RES_P_9: D202.2 J201.9 R211.1
SWD_RES_P_10: D203.2 J201.10 R212.1
USB_CONN_CC1: J200.A5 R208.1
USB_CONN_CC2: J200.B5 R209.1
USB_CONN_D_N: J200.A7 J200.B7 U201.1
USB_CONN_D_P: J200.A6 J200.B6 U201.3
VCOM: R304.2 R309.2 U102.1 U102.4
VDDA: C208.2 C209.2 L200.2 U200.9 | length 0.7
  Top Layer (SIG) w10: U200.9@769.92,2555.28 U200.9
VREF: C107.2 R104.1 R105.2 U102.3
VREF_DC: C402.2 U400.10
XTAL_IN: C202.2 R201.1 Y200.3
pads on no net: J200. J200.A8 J200.B8 J200.S1 J200.S2 J200.S3 J200.S4 J201.4 J201.7 J301.MH1 J301.MH2 J400.MH1 J400.MH2 U200.2 U200.3 U200.4 U200.10 U200.11 U200.12 U200.13 U200.17 U200.18 U200.19 U200.20 U200.27 U200.29 U200.30 U200.31 U200.38 U200.40 U200.41 U200.46

## Text inside footprints (layer, text, board x,y; h text height)
J200: Mechanical 13 "PCB EDGE" at 2389.8,2804.72 h24 r90